# Altium PCB FiltrosRF_R00.PcbDoc
Units mil, origin at the board's own origin, x right, y up, seen from the top; angles counter-clockwise.
Board outline 2362.2 x 2755.91 mil, 2 copper layers (Top Layer, Bottom Layer); 32 components, 39 nets, 136 pads, 767 vias.
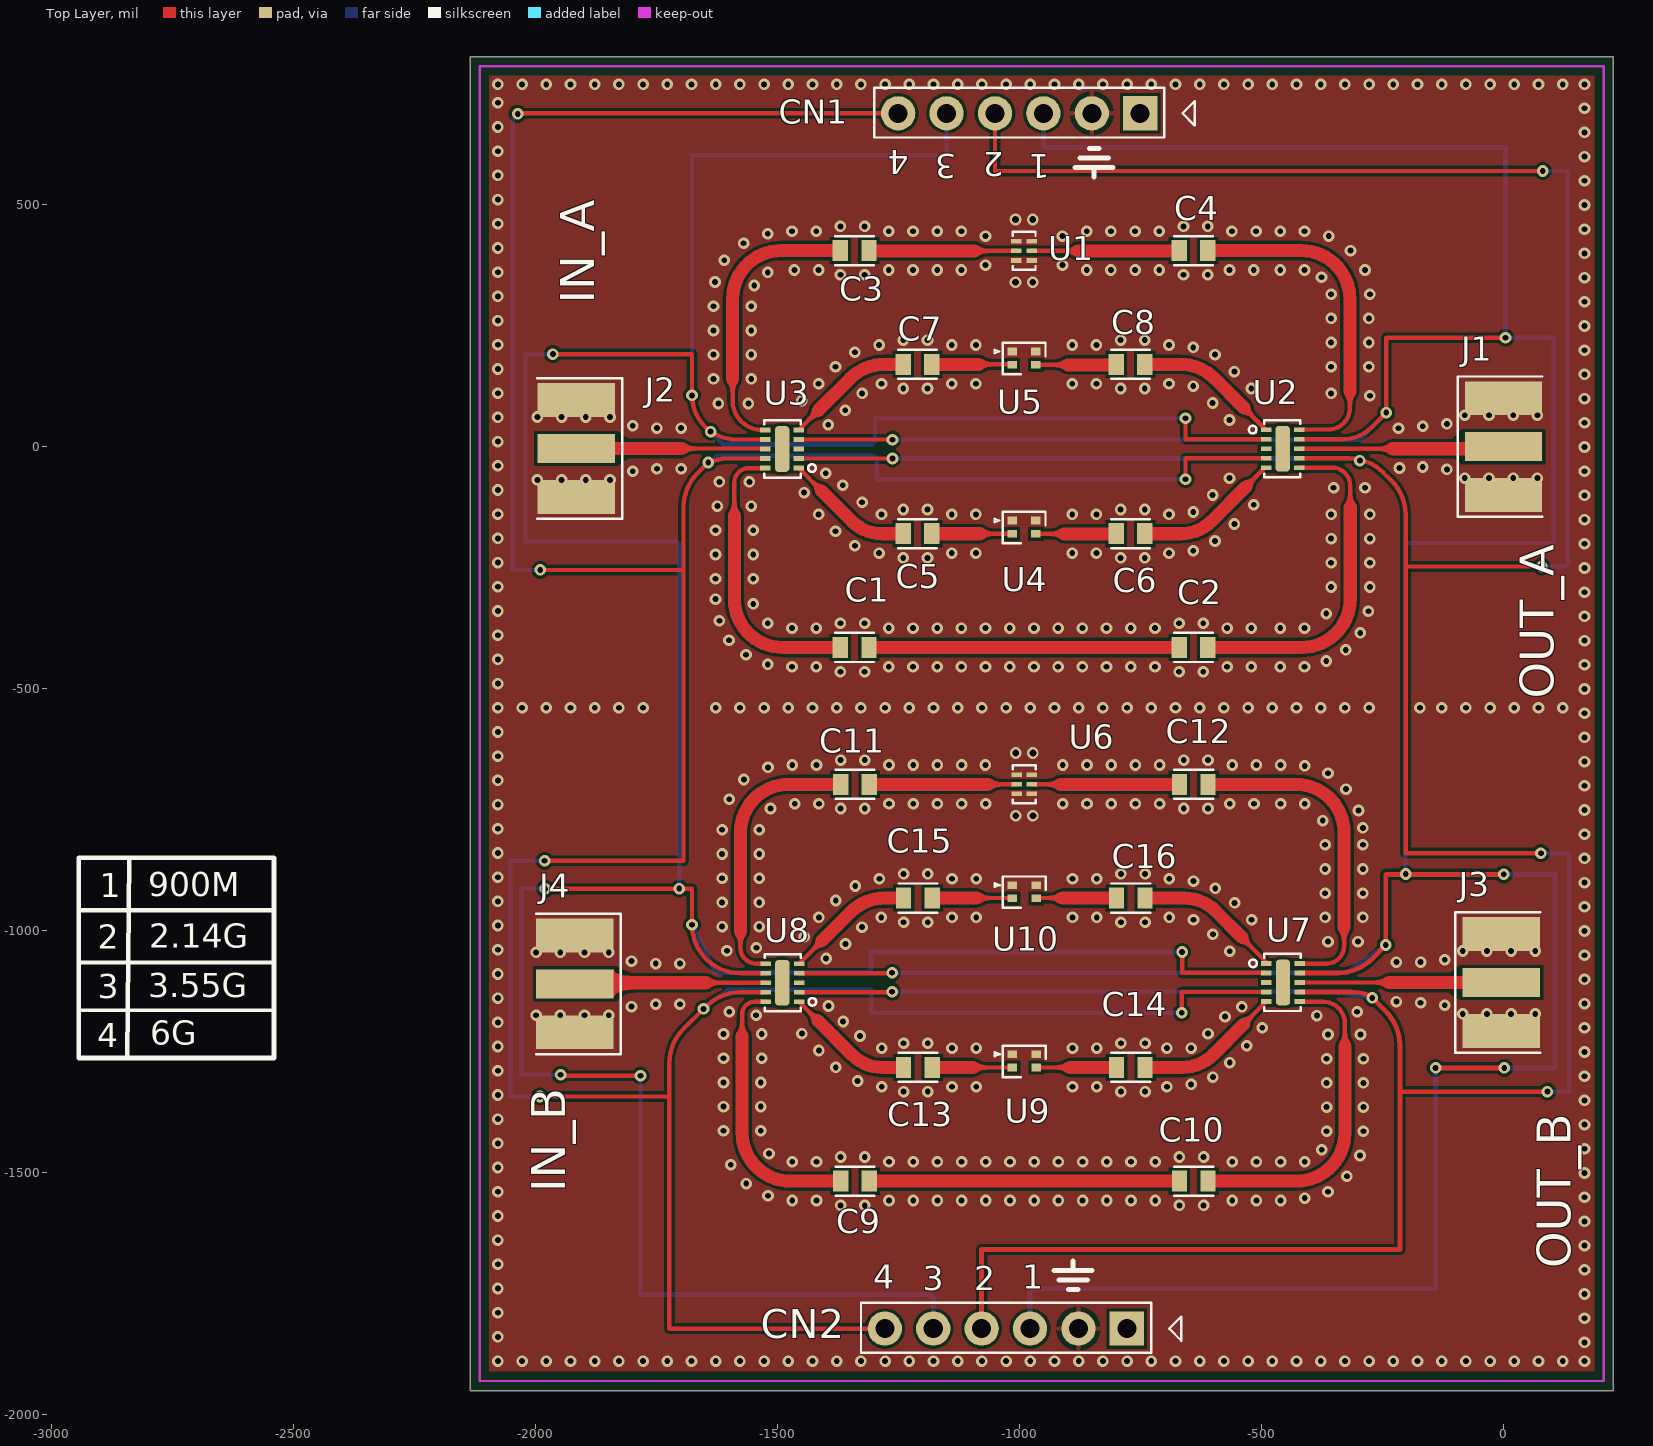
[diagram p0: Top Layer view]
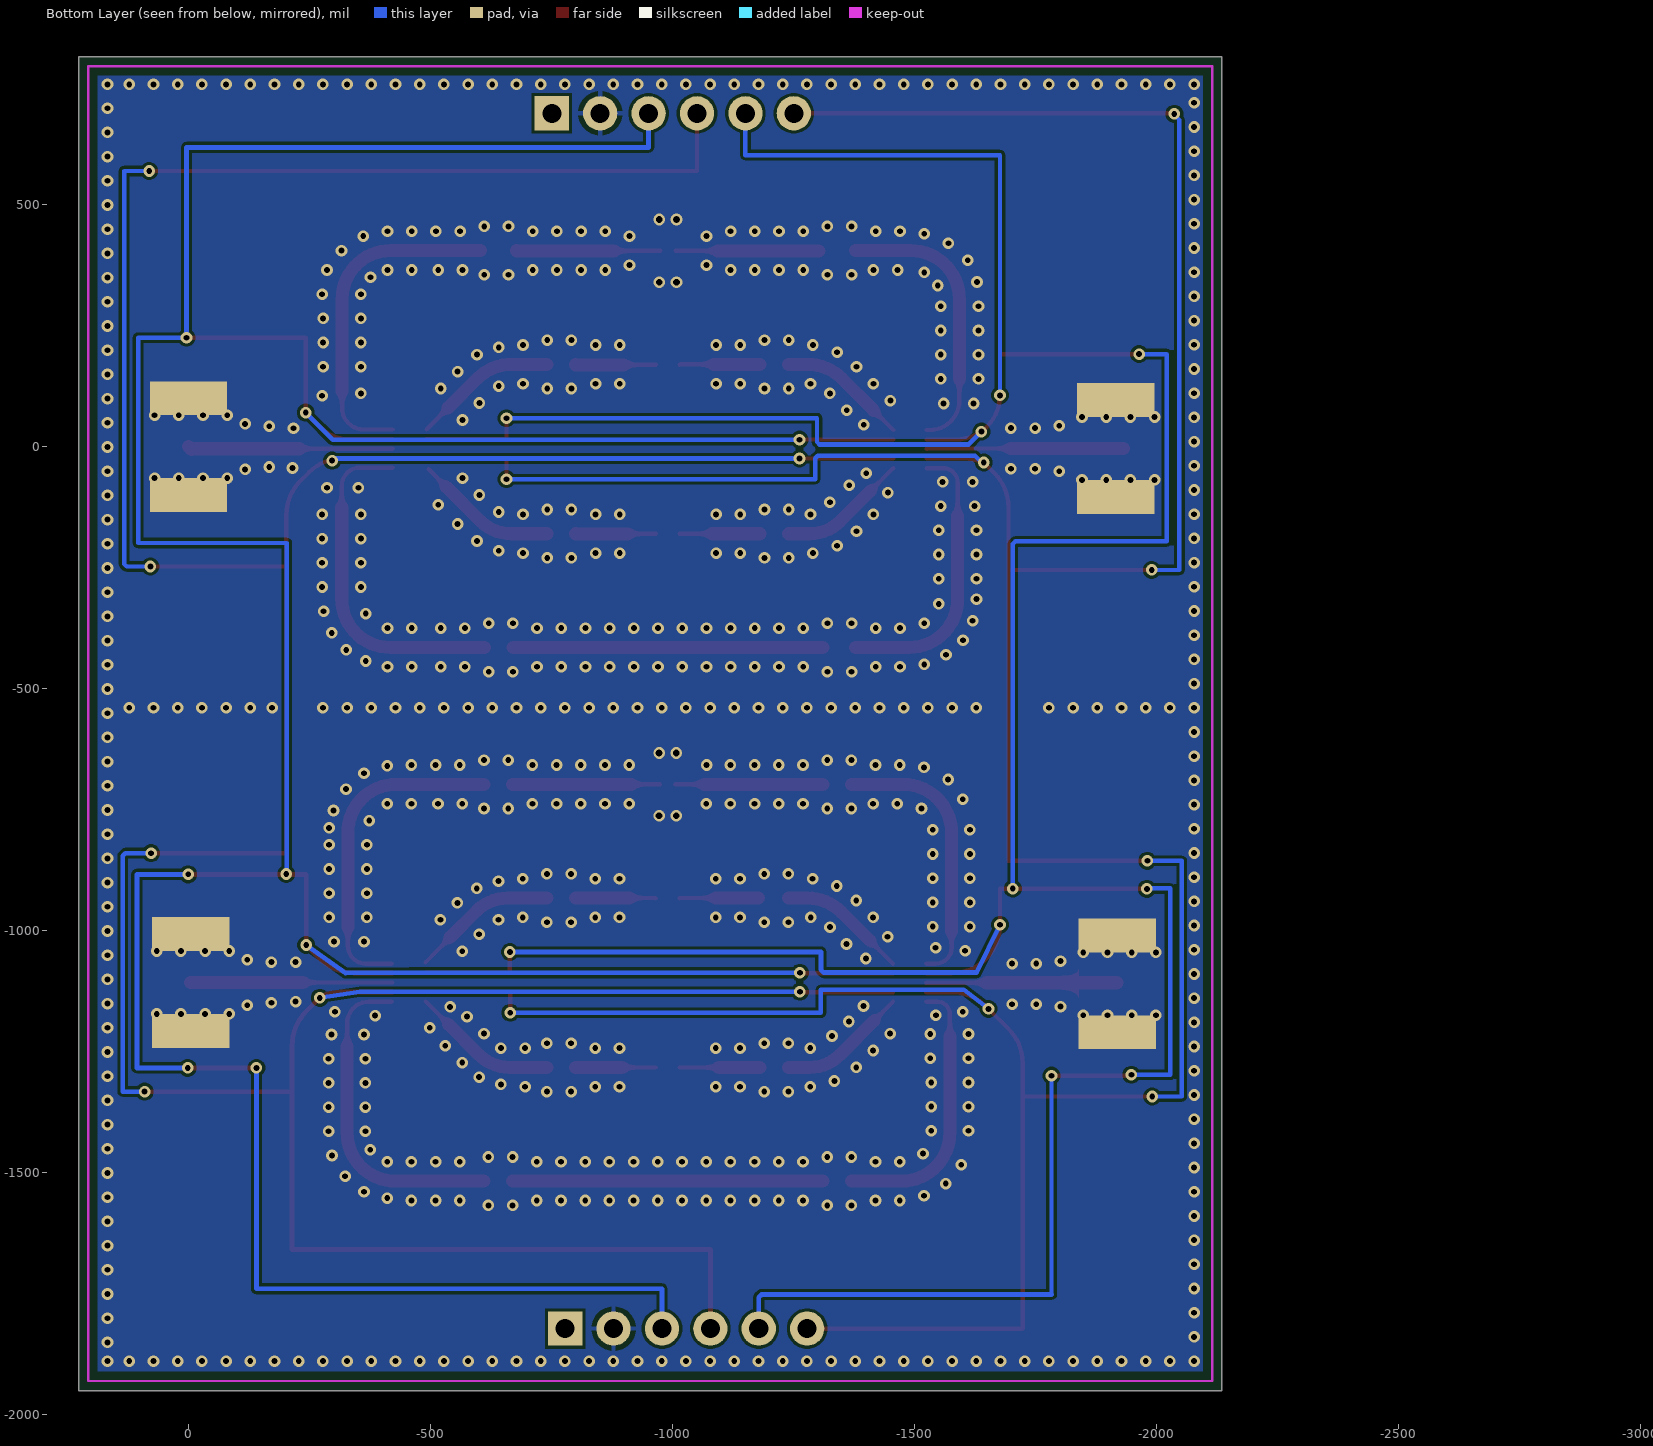
[diagram p1: Bottom Layer view, seen from below]
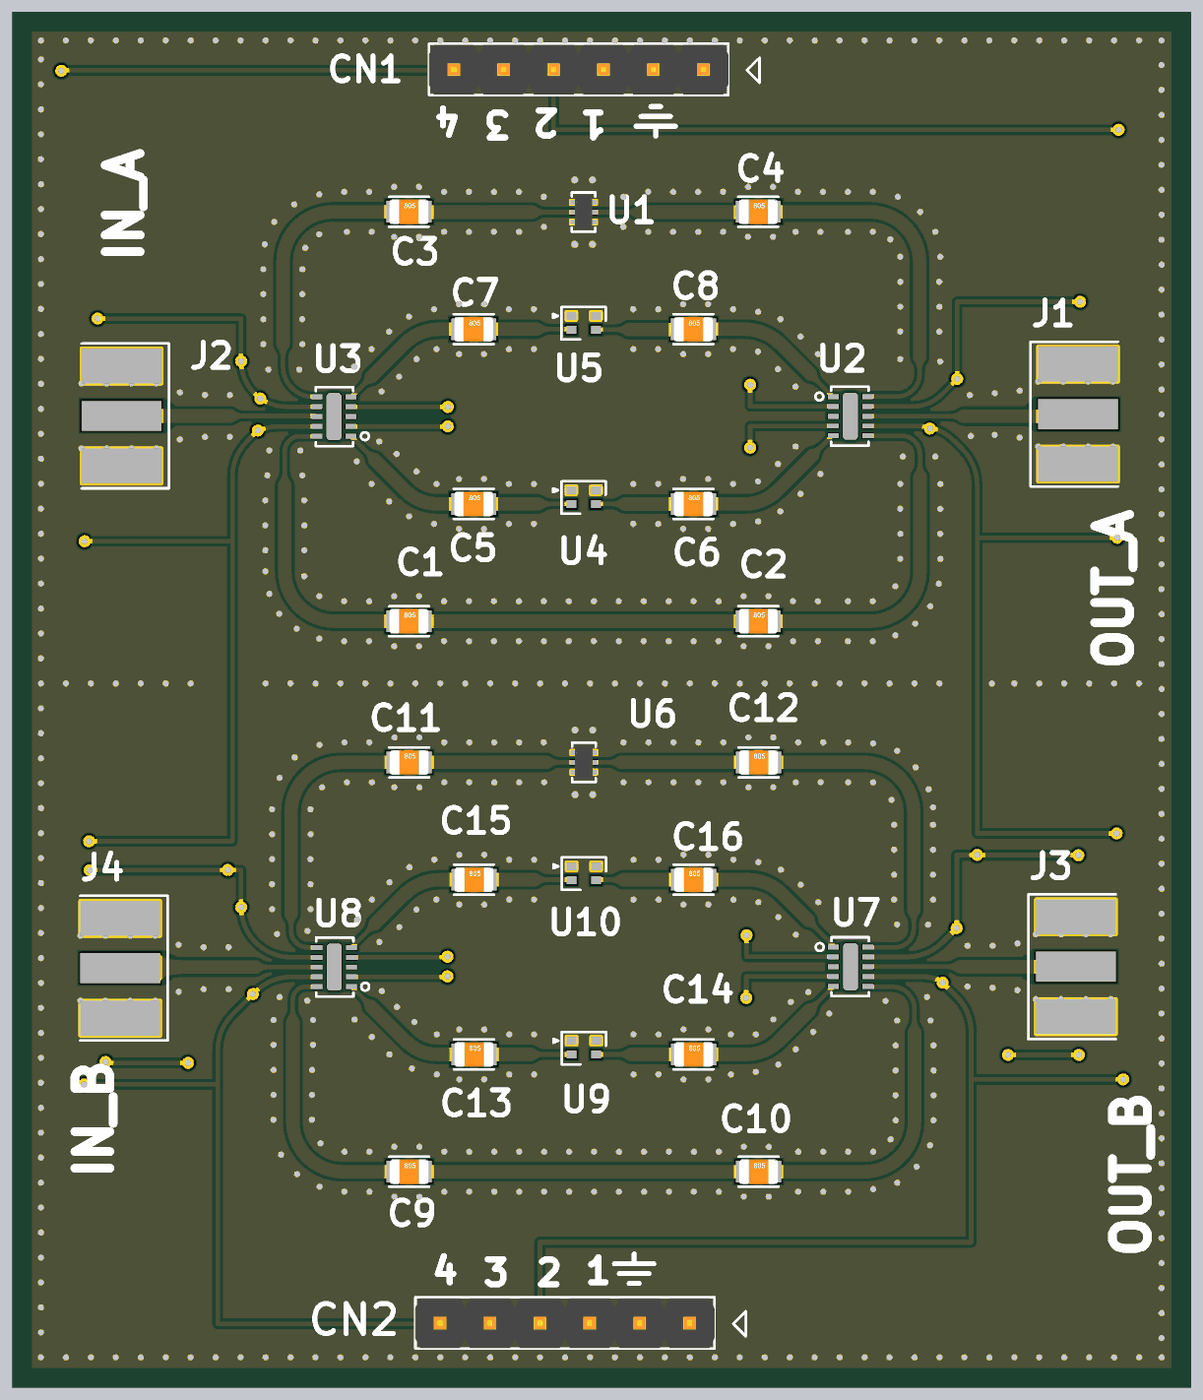
[diagram p2: 3D render of the assembled board from above, using the file's embedded part models]

## Layer stack, top to bottom
Top Solder: solder mask 0.4, Solder Resist, Dk 3.5
Top Layer: signal copper 1.4
Dielectric 1: dielectric 12.6, FR-4, Dk 4.8
Bottom Layer: signal copper 1.4
Bottom Solder: solder mask 0.4, Solder Resist, Dk 3.5

## Board outline
-2135.38,-1950.16 -2135.38,805.74 226.82,805.74 226.82,-1950.16

## Design rules (kind name [scope] priority, off if disabled: settings)
Clearance Clearance_1 [OnMid vs OnMid] p1: gap=6 ignorepadtopadclearanceinfootprint=FALSE sourcerule=39 cellrowname=All cellrowtype=0 cellcolname=All cellcoltype=0 innerlayers=TRUE
Clearance Clearance_2 [(ExistsOnLayer('Top Layer') Or ExistsOnLayer('Bottom Layer')) vs (ExistsOnLayer('Top Layer') Or ExistsOnLayer('Bottom Layer'))] p2: gap=6 ignorepadtopadclearanceinfootprint=FALSE sourcerule=39 cellrowname=All cellrowtype=0 cellcolname=All cellcoltype=0 outerlayers=TRUE
Clearance [All] p3: gap=10 ignorepadtopadclearanceinfootprint=FALSE ismatrix=TRUE
PolygonConnect [All] p1: thpad.connectstyle=Relief thpad.reliefconductorwidth=10 thpad.reliefentries=4 thpad.polygonreliefangle="90 Angle" thpad.airgapwidth=10 smdpad.connectstyle=Direct smdpad.reliefconductorwidth=10 smdpad.reliefentries=4 smdpad.polygonreliefangle="90 Angle" smdpad.airgapwidth=10 via.connectstyle=Direct via.reliefconductorwidth=10 via.reliefentries=4 via.polygonreliefangle="90 Angle" via.airgapwidth=10
RoutingVias RoutingViaStyle_1 [All] p1: holewidth=12 width=24 viastyle="Through Hole" minholewidth=12 minwidth=24 maxholewidth=24 maxwidth=50
RoutingVias [All] p2: holewidth=28 width=50 viastyle="Through Hole" minholewidth=28 minwidth=50 maxholewidth=28 maxwidth=50
SolderMaskExpansion [All] p1: expansion=4 istentingtop=FALSE
SupplyNets "Schematic Supply Nets" [InNet('GND')] p1: voltage=0.000
Width MaxMinWidth_1 [All] p1: maxlimit=100 minlimit=6 preferedwidth=8 minimp=50.000000 maximp=50.000000 favimp=50.000000
Width [All] p2: maxlimit=10 minlimit=10 preferedwidth=10
30 further rules are at their usual default settings.

## Components (designator, comment, footprint, x,y, rotation, side; value= is the part's Value field where it differs from the comment)
C1 "Capacitor" C_0603 -1340.7,-414.89 r0 top value=47pF
C2 "Capacitor" C_0603 -640.7,-414.89 r0 top value=47pF
C3 "Capacitor" C_0603 -1340.7,405.11 r0 top value=47pF
C4 "Capacitor" C_0603 -640.7,405.11 r0 top value=47pF
C5 "Capacitor" C_0603 -1210.7,-179.89 r0 top value=47pF
C6 "Capacitor" C_0603 -770.7,-179.89 r0 top value=47pF
C7 "Capacitor" C_0603 -1210.7,170.11 r0 top value=47pF
C8 "Capacitor" C_0603 -770.7,170.11 r0 top value=47pF
C9 "Capacitor" C_0603 -1340.11,-1517.64 r0 top value=47pF
C10 "Capacitor" C_0603 -640.11,-1517.64 r0 top value=47pF
C11 "Capacitor" C_0603 -1340.11,-697.64 r0 top value=47pF
C12 "Capacitor" C_0603 -640.11,-697.64 r0 top value=47pF
C13 "Capacitor" C_0603 -1210.11,-1282.64 r0 top value=47pF
C14 "Capacitor" C_0603 -770.11,-1282.64 r0 top value=47pF
C15 "Capacitor" C_0603 -1210.11,-932.64 r0 top value=47pF
C16 "Capacitor" C_0603 -770.11,-932.64 r0 top value=47pF
CN1 "CONN_06P" "Header_M_1x6_0.1\"" -750.74,688.81 r180 top
CN2 "CONN_06P" "Header_M_1x6_0.1\"" -778.3,-1822.21 r180 top
J1 "SMA_Connector" SMA_Connector 0,0 r270 top
J2 "SMA_Connector" SMA_Connector -1916.23,-3.71 r90 top
J3 "SMA_Connector" SMA_Connector -4.42,-1107.07 r270 top
J4 "SMA_Connector" SMA_Connector -1918.85,-1110.01 r90 top
U1 "3550LP14A0300001T" "Low Pass Filter 0603 6 Pins" -990.7,404.56 r0 top
U2 "SKY13322-375LF" "SP4T Switch RF" -490.7,35.11 r0 top
U3 "SKY13322-375LF" "SP4T Switch RF" -1456.25,-44.26 r180 top
U4 "LP0603A-XXXX-ANTR" "Low Pass Filter 0603 4 Pins" -990.7,-166.3 r0 top
U5 "LP0603A-XXXX-ANTR" "Low Pass Filter 0603 4 Pins" -990.7,182.91 r0 top
U6 "3550LP14A0300001T" "Low Pass Filter 0603 6 Pins" -990.11,-697.64 r0 top
U7 "SKY13322-375LF" "SP4T Switch RF" -490.11,-1067.64 r0 top
U8 "SKY13322-375LF" "SP4T Switch RF" -1455.66,-1147.01 r180 top
U9 "LP0603A-XXXX-ANTR" "Low Pass Filter 0603 4 Pins" -990.11,-1269.06 r0 top
U10 "LP0603A-XXXX-ANTR" "Low Pass Filter 0603 4 Pins" -990.11,-919.64 r0 top

## Footprints (in the part's own frame and the unit in brackets; to place one, negate y for a bottom-side part, rotate by r counter-clockwise, add the part's x,y. Pads: shape width x height; smd on the part's side, far side on the other; paste and mask are expansions set on the pad)
C_0603 [mm] "Chip Capacitor, 2-Leads,"
  rect 0.8x1.1 smd: 1(-0.75,0) 2(0.75,0)
  silkscreen extent -1.02,-0.76 1.02,0.76, body extent -1,-0.62 1,0.63, height 0.78
"Header_M_1x6_0.1\"" [mm] "Header Male 1 x 6 Vias Pitch 100mils"
  rect 1.8x1.8 hole 1: 1(0,0)
  round 1.8 hole 1: 2(2.54,0) 3(5.08,0) 4(7.62,0) 5(10.16,0) 6(12.7,0)
  silkscreen extent -2.86,-1.35 13.95,1.27, body extent -1.27,-1.3 13.97,1.24, height 8.47
"Low Pass Filter 0603 4 Pins" [mm]
  rect 0.5x0.4 smd: 1(-0.625,0.35) 2(-0.625,-0.35) 3(0.625,-0.35) 4(0.625,0.35)
  silkscreen extent -1.55,-0.85 1.12,0.8
"Low Pass Filter 0603 6 Pins" [mm]
  rect 0.55x0.25 smd mask+0.06: 1(-0.4,0.5) 2(-0.4,0) 3(-0.4,-0.5) 4(0.4,-0.5) 5(0.4,0) 6(0.4,0.5)
  silkscreen extent -0.6,-1 0.6,1, body extent -0.45,-0.85 0.45,0.85, height 0.71
SMA_Connector [mil] "SMA PCB Connector 1.6mm / PN: EMPCB.CSMAFSTJ.A"
  rect 60x160 smd: 1(0,0)
  rect 70x160 smd: 2(-100,0) 2(100,0)
  rect 70x160 smd far side: 2(-100,0) 2(100,0)
  silkscreen extent -145,-95 145,80, body extent -121,-60 121,80, height 10
"SP4T Switch RF" [mm]
  rect 0.55x0.25 smd mask+0.05: 1(0,0) 2(0,-0.5) 3(0,-1) 4(0,-1.5) 5(0,-2) 6(1.75,-2) 7(1.75,-1.5) 8(1.75,-1) 9(1.75,-0.5) 10(1.75,0)
  rrect50% 0.76x2.4 smd mask+0.05: ""(0.875,-1)
  silkscreen extent -0.9,-2.5 1.8,0.5

## Part data
CN1 CN2: "Connector Generic 4 Vias"
J1 J2 J3 J4: "Connector SMA"
U1 U6: "RF FILTER LOW PASS  0603"
U2 U3 U7 U8: "RF Switch IC General Purpose SP4T 6 GHz 50Ohm 10-MLPD (3x2)"
U4 U5 U9 U10: "RF FILTER 0603"
C1 C2 C3 C4 C5 C6 C7 C8 C9 C10 C11 C12 C13 C14 C15 C16: SimulationGenericComponent=True

## Via types
v1: diameter 24, hole 12, Top Layer to Bottom Layer, tented top, 724 vias
v2: diameter 24, hole 12, Top Layer to Bottom Layer, 35 vias
v3: diameter 24, hole 13.78, Top Layer to Bottom Layer, tented top, 4 vias
v4: diameter 24.02, hole 13.78, Top Layer to Bottom Layer, tented top, 4 vias

## Nets (pads, with @x,y where several pads share a name; then routed paths per layer and width w, separated by ;. In a path a pad name is that pad's centre, name@x,y a point inside that pad or via, vN(x,y) a via of type N, cw(c..) or ccw(c..) an arc to the next point about the centre after c; other vN are vias at no path point)
1A_IN: C7.1 U3.5 | length 267.9
  Top Layer w9: U3.5 -1415.7,75.03
  Top Layer w27: -1415.7,75.03 -1349.91,140.82 cw(c-1279.2,70.11) -1279.2,170.11 C7.1
1A_OUT: C6.2 U2.5 | length 296.2
  Top Layer w9: -532.51,-83.13 U2.5@-496.25,-46.87
  Top Layer w27: C6.2 -666.37,-179.89 ccw(c-666.37,-90.32) -603.04,-153.65 -532.51,-83.13
1B_IN: C15.1 U8.5 | length 267.9
  Top Layer w9: U8.5 -1407.85,-1020.46
  Top Layer w27: -1407.85,-1020.46 -1349.32,-961.93 cw(c-1278.61,-1032.64) -1278.61,-932.64 C15.1
1B_OUT: C14.2 U7.5 | length 303
  Top Layer w9: -537.61,-1193.88 U7.5
  Top Layer w27: C14.2 -663.59,-1282.64 ccw(c-663.59,-1192.78) -600.05,-1256.32 -537.61,-1193.88
2A_IN: C5.1 U3.1 | length 268.4
  Top Layer w9: U3.1 -1409.01,-91.5
  Top Layer w27: -1409.01,-91.5 -1346.17,-154.34 ccw(c-1284.49,-92.66) -1284.49,-179.89 C5.1
2A_OUT: C8.2 U2.1 | length 300.3
  Top Layer w9: -536.66,80.44 U2.1@-492.17,35.95
  Top Layer w27: C8.2 -667.75,170.11 cw(c-667.75,70.11) -597.04,140.82 -536.66,80.44
2B_IN: C13.1 U8.1 | length 268.4
  Top Layer w9: U8.1 -1416.09,-1186.58
  Top Layer w27: -1416.09,-1186.58 -1345.58,-1257.09 ccw(c-1283.9,-1195.41) -1283.9,-1282.64 C13.1
2B_OUT: C16.2 U7.1 | length 302.2
  Top Layer w9: -540.9,-1013.55 U7.1@-489.71,-1065.52
  Top Layer w27: C16.2 -659.6,-932.64 cw(c-659.6,-1023.91) -595.07,-959.37 -540.9,-1013.55
3A_IN: C3.1 U3.6 | length 584.2
  Top Layer w9: -1592.86,139.99 -1592.86,95.11 ccw(c-1532.23,95.11) -1532.23,34.48 U3.6
  Top Layer w27: -1592.86,139.99 -1592.86,305.11 cw(c-1492.86,305.11) -1492.86,405.11 C3.1@-1378.1,405.11
3A_OUT: C2.2 U2.6 | length 712.6
  Top Layer w9: U2.6@-422.19,-43.31 -354.08,-43.31 cw(c-354.08,-80.71) -316.68,-80.71 -316.68,-125.2
  Top Layer w27: C2.2 -416.68,-414.89 ccw(c-416.68,-314.89) -316.68,-314.89 -316.68,-125.2
3B_IN: C11.1 U8.6 | length 572.8
  Top Layer w9: -1576.72,-1001.34 -1576.72,-1035.2 ccw(c-1543.65,-1035.2) -1543.65,-1068.27 U8.6
  Top Layer w27: -1576.72,-1001.34 -1576.72,-797.64 cw(c-1476.72,-797.64) -1476.72,-697.64 C11.1
3B_OUT: C10.2 U7.6 | length 684
  Top Layer w9: U7.6@-420.28,-1147.01 -372.24,-1147.01 cw(c-372.24,-1191.5) -327.76,-1191.5 -327.76,-1237.96
  Top Layer w27: C10.2 -427.76,-1517.64 ccw(c-427.76,-1417.64) -327.76,-1417.64 -327.76,-1237.96
4A_IN: C1.1 U3.10 | length 590.1
  Top Layer w9: -1589.32,-141.9 -1589.32,-74.57 cw(c-1559.01,-74.57) -1559.01,-44.26 U3.10
  Top Layer w27: -1589.32,-141.9 -1589.32,-314.89 ccw(c-1489.32,-314.89) -1489.32,-414.89 C1.1@-1378.1,-414.89
4A_OUT: C4.2 U2.10 | length 698.3
  Top Layer w9: U2.10@-422.19,35.43 -365.11,35.43 -361.96,35.39 ccw(c-361.96,79.88) -317.47,79.88 -317.47,114.13
  Top Layer w27: C4.2@-603.3,405.11 -417.47,405.11 cw(c-417.47,305.11) -317.47,305.11 -317.47,114.13
4B_IN: C9.1 U8.10 | length 568.9
  Top Layer w9: -1573.18,-1217.88 -1573.18,-1172.6 cw(c-1547.59,-1172.6) -1547.59,-1147.01 U8.10
  Top Layer w27: -1573.18,-1217.88 -1573.18,-1417.64 ccw(c-1473.18,-1417.64) -1473.18,-1517.64 C9.1
4B_OUT: C12.2 U7.10 | length 684
  Top Layer w9: U7.10@-420.28,-1068.27 -366.34,-1068.27 ccw(c-366.34,-1031.27) -329.33,-1031.27 -329.33,-993.86
  Top Layer w27: C12.2 -429.33,-697.64 cw(c-429.33,-797.64) -329.33,-797.64 -329.33,-993.86
CTRL1: CN1.3 CN2.3 U2.9 U3.4 U7.9 U8.4 | length 8719.5
  Top Layer w9: U3.4 v2@-1262.55,14.8 ; U8.4 -1264.36,-1087.96 v2(-1263.34,-1086.93) ; U2.9 -331.52,15.43 ccw(c-331.52,98.53) -272.76,39.77 v2(-242.23,70.29) -242.23,225 v2(4,225)
  Top Layer w10: U7.9 -342.28,-1087.33 ccw(c-342.28,-987.33) -271.57,-1058.04 v2(-243.23,-1029.71) -243.23,-883.64 v2(0.58,-883.64) ; v2(-140.42,-1283.64) v2(1.58,-1283.64)
  Bottom Layer w9: v2(-202,-883) -203,-883 -203,-199 104,-199 104,225 v2(4,225)
  Bottom Layer w10: v2(-1263.34,-1086.93) -456.25,-1086.93 -324.22,-1087.38 v2(-243.23,-1029.71) ; v2(-1262.55,14.4) -298.12,14.4 v2(-242.23,70.29) ; CN2.3 -978.3,-1739.93 -140.42,-1739.93 v2(-140.42,-1283.64) ; CN1.3 -950.74,618.34 4,618.34 v2(4,225) ; v2(0.58,-883.64) 106.58,-883.64 106.58,-1283.64 v2(1.58,-1283.64)
CTRL2: CN1.4 CN2.4 U2.7 U3.2 U7.7 U8.2 | length 8680
  Top Layer w9: U3.2 v2(-1262.55,-24.57) ; U8.2 -1264.36,-1127.33 v2(-1263.34,-1126.3) ; CN1.4 -1050.74,569.52 v2(81.15,569.52) ; U2.7 -319.56,-23.94 cw(c-319.56,-123.94) -248.85,-53.23 -231.6,-70.48 cw(c-302.31,-141.19) -202.31,-141.19 -202.31,-245.71 ; -214.12,-1332.64 v2(90.58,-1332.64) ; v2(77.21,-839.93) -202.31,-839.93 -202.31,-247.71 v2(78.77,-247.71)
  Top Layer w10: CN2.4 -1078.3,-1658.82 -214.12,-1658.82 -214.12,-1332.64 -214.12,-1237.55 ccw(c-314.12,-1237.55) -243.41,-1166.84 v2(-271.37,-1138.89) ; U7.7 -315.23,-1126.7 cw(c-315.23,-1226.7) v2@-269.83,-1137.6
  Bottom Layer w9: v2(-1263.34,-1126.3) -354.23,-1126.3 v2(-271.37,-1138.89) ; v2(77.21,-839.93) 130.49,-839.93 135.77,-845.2 135.77,-1332.64 v2(90.58,-1332.64) ; v2(78.77,-247.71) 127.73,-247.71 133,-242.43 133,569.52 v2(81.15,569.52)
  Bottom Layer w10: v2(-1262.55,-24.57) -296.8,-24.57 v2(-296.8,-28.9)
CTRL3: CN1.5 CN2.5 U2.2 U3.7 U7.2 U8.7 | length 8137.8
  Top Layer w9: v2(-1980.23,-913.71) -1676.72,-913.71 v2(-1676.72,-987.96) ccw(c-1576.72,-987.96) -1576.72,-1087.96 U8.7 ; v2(-1964.23,191.29) -1676.72,191.29 v2(-1676.72,105.98) ccw(c-1585.54,105.98) -1585.54,14.8 U3.7 ; v2(-1948.23,-1297.71) -1948.23,-1299.71 v2(-1783.23,-1299.71) ; v2(-664.1,-1044.07) -664.1,-1087.33 U7.2 ; v2(-657.04,58.73) -657.04,15.43 U2.2
  Bottom Layer w9: v2(-1980.23,-913.71) -1980.23,-912.71 -2028.23,-912.71 -2028.23,-1297.71 v2(-1948.23,-1297.71) ; v2(-1964.23,191.29) -2021.23,191.29 -2021.23,-195.71 -1708.51,-195.71 -1703.23,-200.98 v2(-1703.23,-913.15) ; -1783.23,-1751.74 v2(-1783.23,-1299.71) ; v2(-1676.72,105.98) -1676.72,602.36 -1150.74,602.36 CN1.5 ; -1304.04,4.29 -1298.77,9.57 -1298.77,58.73 v2(-657.04,58.73)
  Bottom Layer w10: -1783.23,-1751.74 -1184.15,-1751.74 -1178.3,-1757.6 CN2.5 ; v2(-1676.72,-987.96) -1628.28,-1086.71 -1312.5,-1086.71 -1309.57,-1083.78 -1306.64,-1080.85 -1306.64,-1044.07 v2(-664.1,-1044.07) ; v2(-1638.41,31.18) -1611.52,4.29 -1304.04,4.29
CTRL4: CN1.6 CN2.6 U2.4 U3.9 U7.4 U8.9 | length 8003.3
  Top Layer w9: v2@-2038.53,688.81 CN1.6 ; v2(-1991.23,-1342.71) -1723.57,-1342.71 ; v2(-1990.23,-254.71) -1696.65,-254.71 ccw(c-1696.65,-251.29) -1694.23,-253.71 ; v2(-1981.23,-855.71) -1694.23,-855.71 -1694.23,-253.71 ; v2(-1653.1,-1161.74) -1694.28,-1202.92 ccw(c-1623.57,-1273.63) -1723.57,-1273.63 -1723.57,-1342.71 ; v2@-1652.19,-1161.72 cw(c-1576.72,-1227.33) -1576.72,-1127.33 U8.9 ; v2@-1643.7,-33.94 cw(c-1601.44,-124.57) -1601.44,-24.57 U3.9 ; v2(-1643.26,-32.84) -1664.94,-54.53 ccw(c-1594.23,-125.24) -1694.23,-125.24 -1694.23,-253.71 ; CN2.6 -1723.57,-1822.21 -1723.57,-1342.71 ; v2(-664.91,-1169.61) -664.91,-1126.7 U7.4 ; v2(-657.04,-67.25) -657.04,-23.94 U2.4
  Bottom Layer w9: v2(-2036.96,687.63) -2036.96,685.32 -2047.42,674.86 -2047.42,-254.71 v2(-1990.23,-254.71) ; v2(-1991.23,-1342.71) -2052.23,-1342.71 -2052.23,-855.71 v2(-1981.23,-855.71) ; v2(-1653.1,-1161.74) -1602.23,-1122.37 -1306.64,-1122.37 -1306.64,-1169.61 v2(-664.91,-1169.61) ; v2(-1643.26,-32.84) -1639.2,-32.84 -1625.06,-18.71 -1300.1,-18.71 -1294.83,-23.98 -1294.83,-67.25 -1286.96,-67.25 v2(-657.04,-67.25)
GND: CN1.2 CN2.2 J1.2 J2.2 J3.2 J4.2 U1.1 U1.3 U1.4 U1.6 U4.1 U4.4 U5.1 U5.4 U6.1 U6.3 U6.4 U6.6 U9.1 U9.4 U10.1 U10.4
  other v1: -2077.74,-1889.48 -2027.74,-1889.48 -1977.74,-1889.48 -1927.74,-1889.48 -1877.74,-1889.48 -1827.74,-1889.48 -1777.74,-1889.48 -1727.74,-1889.48 -1677.74,-1889.48 -1627.74,-1889.48 -1577.74,-1889.48 -1527.74,-1889.48 -1477.74,-1889.48 -1427.74,-1889.48 -1377.74,-1889.48 -1327.74,-1889.48 -1277.74,-1889.48 -1227.74,-1889.48 -1177.74,-1889.48 -1127.74,-1889.48 -1077.74,-1889.48 -1027.74,-1889.48 -977.74,-1889.48 -927.74,-1889.48 -877.74,-1889.48 -827.74,-1889.48 -777.74,-1889.48 -727.74,-1889.48 -677.74,-1889.48 -627.74,-1889.48 -577.74,-1889.48 -527.74,-1889.48 -477.74,-1889.48 -427.74,-1889.48 -377.74,-1889.48 -327.74,-1889.48 -277.74,-1889.48 -227.74,-1889.48 -177.74,-1889.48 -127.74,-1889.48 -77.74,-1889.48 -27.74,-1889.48 22.26,-1889.48 72.26,-1889.48 122.26,-1889.48 167.26,-1889.48 167.26,-1850.72 -2077.74,-1839.48 167.26,-1800.72 -2077.74,-1789.48 167.26,-1750.72 -2077.74,-1739.48 167.26,-1700.72 -2077.74,-1689.48 167.26,-1650.72 -2077.74,-1639.48 167.26,-1600.72 -2077.74,-1589.48 -1369.64,-1567.64 -1319.64,-1567.64 -669.64,-1567.64 -619.64,-1567.64 -1469.64,-1557.64 -1419.64,-1557.64 -1269.64,-1557.64 -1219.64,-1557.64 -1169.64,-1557.64 -1119.64,-1557.64 -1069.64,-1557.64 -1019.64,-1557.64 -969.64,-1557.64 -919.64,-1557.64 -869.64,-1557.64 -819.64,-1557.64 -769.64,-1557.64 -719.64,-1557.64 -560.58,-1557.64 -510.58,-1557.64 -460.58,-1557.64 -410.58,-1552.64 167.26,-1550.72 -1519.64,-1547.64 -2077.74,-1539.48 -362.58,-1539.64 -1564.64,-1522.64 -323.58,-1507.64 167.26,-1500.72 -2077.74,-1489.48 -1596.64,-1483.64 -1469.64,-1477.64 -1419.64,-1477.64 -1269.64,-1477.64 -1219.64,-1477.64 -1169.64,-1477.64 -1119.64,-1477.64 -1069.64,-1477.64 -1019.64,-1477.64 -969.64,-1477.64 -919.64,-1477.64 -869.64,-1477.64 -819.64,-1477.64 -769.64,-1477.64 -719.64,-1477.64 -560.58,-1477.64 -510.58,-1477.64 -460.58,-1477.64 -410.58,-1477.64 -1369.64,-1467.64 -1319.64,-1467.64 -669.64,-1467.64 -619.64,-1467.64 -296.58,-1464.64 -1517.64,-1460.64 -375.58,-1452.64 167.26,-1450.72 -2077.74,-1439.48 -365.58,-1414.64 -289.58,-1414.64 -1611.64,-1413.64 -1534.64,-1413.64 167.26,-1400.72 -2077.74,-1389.48 -365.58,-1364.64 -289.58,-1364.64 -1611.64,-1363.64 -1534.64,-1363.64 167.26,-1350.72 -2077.74,-1339.48 -1239.64,-1332.64 -1189.64,-1332.64 -790.58,-1332.64 -740.58,-1332.64 -1284.64,-1322.64 -1139.64,-1322.64 -1089.64,-1322.64 -890.58,-1322.64 -840.58,-1322.64 -695.58,-1322.64 -645.58,-1317.64 -365.58,-1314.64 -289.58,-1314.64 -1611.64,-1313.64 -1534.64,-1313.64 -1334.64,-1310.64 -600.58,-1302.64 167.26,-1300.72 -2077.74,-1289.48 -1379.64,-1282.64 -565.58,-1272.64 -365.58,-1264.64 -289.58,-1264.64 -1611.64,-1263.64 -1532.64,-1263.64 167.26,-1250.72 -1414.64,-1247.64 -1284.64,-1242.64 -1139.64,-1242.64 -1089.64,-1242.64 -890.58,-1242.64 -840.58,-1242.64 -695.58,-1242.64 -645.58,-1242.64 -2077.74,-1239.48 -530.58,-1237.64 -1239.64,-1232.64 -1189.64,-1232.64 -790.58,-1232.64 -740.58,-1232.64 -1329.64,-1217.64 -362.58,-1214.64 -295.58,-1214.64 -1611.64,-1213.64 -1532.64,-1213.64 -1449.64,-1212.64 -610.58,-1212.64 167.26,-1200.72 -498.58,-1200.64 -2077.74,-1189.48 -1364.64,-1187.64 -575.58,-1177.64 -1998.85,-1175.01 -1948.85,-1175.01 -1898.85,-1175.01 -1848.85,-1175.01 -1544.26,-1174.91 -385.58,-1175.64 -84.42,-1172.07 -34.42,-1172.07 15.58,-1172.07 65.58,-1172.07 -1599.64,-1167.64 -302.58,-1167.64 -1801.85,-1157.01 -540.58,-1157.64 -1394.64,-1155.64 -121.42,-1154.07 -1751.85,-1152.01 -1701.85,-1152.01 167.26,-1150.72 -171.42,-1149.07 -221.42,-1146.64 -2077.74,-1139.48 167.26,-1100.72 -2077.74,-1089.48 -1751.85,-1068.01 -1701.85,-1068.01 -221.42,-1065.07 -171.42,-1065.07 -1801.85,-1063.01 -121.42,-1060.07 -1399.64,-1057.64 167.26,-1050.72 -1998.85,-1045.01 -1948.85,-1045.01 -1898.85,-1045.01 -1848.85,-1045.01 -565.58,-1042.64 -84.42,-1042.07 -34.42,-1042.07 15.58,-1042.07 65.58,-1042.07 -1604.64,-1041.64 -2077.74,-1039.48 -1543.65,-1035.2 -1359.64,-1027.64 -362.58,-1022.64 -300.58,-1022.64 -1444.64,-1012.64 -600.58,-1007.64 167.26,-1000.72 -1325.58,-992.64 -1614.64,-991.64 -1537.64,-991.64 -2077.74,-989.48 -1239.64,-982.64 -1189.64,-982.64 -790.58,-982.64 -740.58,-982.64 -640.58,-977.64 -520.58,-977.64 -1414.64,-972.64 -1285.58,-972.64 -1139.64,-972.64 -1089.64,-972.64 -890.58,-972.64 -840.58,-972.64 -690.58,-972.64 -368.58,-972.64 -290.58,-972.64 167.26,-950.72 -555.58,-942.64 -1614.64,-941.64 -1537.64,-941.64 -2077.74,-939.48 -1379.64,-937.64 -368.58,-922.64 -290.58,-922.64 -595.58,-912.64 -1339.64,-907.64 167.26,-900.72 -640.58,-897.64 -1289.64,-892.64 -1139.64,-892.64 -1089.64,-892.64 -890.58,-892.64 -840.58,-892.64 -690.58,-892.64 -1614.64,-891.64 -1537.64,-891.64 -2077.74,-889.48 -1239.64,-882.64 -1189.64,-882.64 -790.58,-882.64 -740.58,-882.64 -368.58,-872.64 -290.58,-872.64 167.26,-850.72 -1614.64,-841.64 -1537.64,-841.64 -2077.74,-839.48 -368.58,-822.64 -290.58,-822.64 167.26,-800.72 -1614.64,-791.64 -1537.64,-791.64 -2077.74,-789.48 -290.58,-787.64 -373.58,-772.64 -299.58,-751.64 167.26,-750.72 -1514.64,-747.64 -1369.64,-747.64 -1319.64,-747.64 -660.58,-747.64 -610.58,-747.64 -2077.74,-739.48 -1464.64,-737.64 -1414.64,-737.64 -1269.64,-737.64 -1219.64,-737.64 -1169.64,-737.64 -1119.64,-737.64 -1069.64,-737.64 -910.58,-737.64 -860.58,-737.64 -810.58,-737.64 -760.58,-737.64 -710.58,-737.64 -565.58,-737.64 -515.58,-737.64 -460.58,-737.64 -410.58,-737.64 -1599.64,-728.64 -325.58,-707.64 167.26,-700.72 -2077.74,-689.48 -1569.64,-687.64 -362.58,-674.64 -1519.64,-662.64 -410.58,-659.64 -1469.64,-657.64 -1419.64,-657.64 -1269.64,-657.64 -1219.64,-657.64 -1169.64,-657.64 -1119.64,-657.64 -1070.58,-657.64 -910.58,-657.64 -860.58,-657.64 -810.58,-657.64 -760.58,-657.64 -710.58,-657.64 -560.58,-657.64 -510.58,-657.64 -460.58,-657.64 167.26,-650.72 -1369.64,-647.64 -1319.64,-647.64 -660.58,-647.64 -610.58,-647.64 -2077.74,-639.48 167.26,-600.72 -2077.74,-589.48 167.26,-550.72 -2077.74,-539.48 -2027.74,-539.48 -1977.74,-539.48 -1927.74,-539.48 -1877.74,-539.48 -1827.74,-539.48 -1777.74,-539.48 -1627.74,-539.48 -1577.74,-539.48 -1527.74,-539.48 -1477.74,-539.48 -1427.74,-539.48 -1377.74,-539.48 -1327.74,-539.48 -1277.74,-539.48 -1227.74,-539.48 -1177.74,-539.48 -1127.74,-539.48 -1077.74,-539.48 -1027.74,-539.48 -977.74,-539.48 -927.74,-539.48 -877.74,-539.48 -827.74,-539.48 -777.74,-539.48 -727.74,-539.48 -677.74,-539.48 -627.74,-539.48 -577.74,-539.48 -527.74,-539.48 -477.74,-539.48 -427.74,-539.48 -377.74,-539.48 -327.74,-539.48 -277.74,-539.48 -172.74,-539.48 -127.74,-539.48 -77.74,-539.48 -27.74,-539.48 22.26,-539.48 72.26,-539.48 122.26,-539.48 167.26,-500.72 -2077.74,-489.48 -1370.23,-464.89 -1320.23,-464.89 -670.23,-464.89 -620.23,-464.89 -1470.23,-454.89 -1420.23,-454.89 -1270.23,-454.89 -1220.23,-454.89 -1170.23,-454.89 -1120.23,-454.89 -1070.23,-454.89 -1020.23,-454.89 -970.23,-454.89 -920.23,-454.89 -870.23,-454.89 -820.23,-454.89 -770.23,-454.89 -720.23,-454.89 -571.17,-454.89 -521.17,-454.89 -461.17,-454.89 -411.17,-454.89 167.26,-450.72 -1520.23,-449.89 -366.17,-442.89 -2077.74,-439.48 -1565.23,-429.89 -326.17,-419.89 167.26,-400.72 -1600.23,-399.89 -2077.74,-389.48 -296.17,-384.89 -1470.23,-374.89 -1420.23,-374.89 -1270.23,-374.89 -1220.23,-374.89 -1170.23,-374.89 -1120.23,-374.89 -1070.23,-374.89 -1020.23,-374.89 -970.23,-374.89 -920.23,-374.89 -870.23,-374.89 -820.23,-374.89 -770.23,-374.89 -720.23,-374.89 -571.17,-374.89 -521.17,-374.89 -461.17,-374.89 -411.17,-374.89 -1520.23,-364.89 -1370.23,-364.89 -1320.23,-364.89 -670.23,-364.89 -620.23,-364.89 -1620.23,-359.89 167.26,-350.72 -366.17,-344.89 -279.17,-339.89 -2077.74,-339.48 -1550.23,-324.89 -1628.23,-314.89 167.26,-300.72 -356.17,-289.89 -276.17,-289.89 -2077.74,-289.48 -1628.23,-272.89 -1550.23,-272.89 167.26,-250.72 -356.17,-239.89 -276.17,-239.89 -2077.74,-239.48 -1240.23,-229.89 -1190.23,-229.89 -791.17,-229.89 -741.17,-229.89 -1628.23,-222.89 -1550.23,-222.89 -1290.23,-219.89 -1140.23,-219.89 -1090.23,-219.89 -891.17,-219.89 -841.17,-219.89 -691.17,-219.89 -641.17,-214.89 -1340.23,-204.89 167.26,-200.72 -596.17,-194.89 -356.17,-189.89 -276.17,-189.89 -2077.74,-189.48 -1380.23,-174.89 -1628.32,-172.89 -1550.23,-172.89 -556.17,-159.89 167.26,-150.72 -1415.23,-139.89 -1285.23,-139.89 -1140.23,-139.89 -1090.23,-139.89 -891.17,-139.89 -841.17,-139.89 -691.17,-139.89 -356.17,-139.89 -276.17,-139.89 -2077.74,-139.48 -641.17,-134.89 -1240.23,-129.89 -1190.23,-129.89 -791.17,-129.89 -741.17,-129.89 -1624.23,-122.89 -1554.23,-122.89 -516.17,-119.89 -1325.23,-114.89 167.26,-100.72 -601.17,-99.89 -1445.23,-94.89 -2077.74,-89.48 -351.17,-84.89 -286.17,-84.89 -1365.23,-79.89 -1620.23,-72.89 -1558.23,-72.89 -1996.23,-68.71 -1946.23,-68.71 -1896.23,-68.71 -1846.23,-68.71 -566.17,-64.89 -80,-65 -30,-65 20,-65 70,-65 -1400.23,-54.89 -1799.23,-50.71 167.26,-50.72 -117,-47 -1749.23,-45.71 -1699.23,-45.71 -215,-44 -167,-42 -2077.74,-39.48 167.26,-0.72 -2077.74,10.52 -1749.23,38.29 -1699.23,38.29 -217,38 -167,42 -1799.23,43.29 -1395.23,45.11 -117,47 167.26,49.28 -566.17,55.11 -2077.74,60.52 -1996.23,61.29 -1946.23,61.29 -1896.23,61.29 -1846.23,61.29 -80,65 -30,65 20,65 70,65 -1360.23,75.11 -1622.23,89.11 -1560.23,89.11 -601.17,90.11 -1450.23,95.11 167.26,99.28 -276.17,105.11 -1325.23,110.11 -356.17,110.11 -2077.74,110.52 -1240.23,120.11 -1190.23,120.11 -791.17,120.11 -741.17,120.11 -521.17,120.11 -641.17,125.11 -1415.23,130.11 -1285.23,130.11 -1140.23,130.11 -1090.23,130.11 -891.17,130.11 -841.17,130.11 -691.17,130.11 -1632.23,140.11 -1554.23,140.11 167.26,149.28 -556.17,155.11 -2077.74,160.52 -1380.23,165.11 -356.17,165.11 -278.17,165.11 -1632.23,190.11 -1554.23,190.11 -596.17,190.11 -1340.23,195.11 167.26,199.28 -641.17,205.11 -1290.23,210.11 -1140.23,210.11 -1090.23,210.11 -891.17,210.11 -841.17,210.11 -691.17,210.11 -2077.74,210.52 -356.17,215.11 -278.17,215.11 -1240.23,220.11 -1190.23,220.11 -791.17,220.11 -741.17,220.11 -1632.23,240.11 -1554.23,240.11 167.26,249.28 -2077.74,260.52 -356.17,265.11 -278.17,265.11 -1632.23,290.11 -1554.23,290.11 167.26,299.28 -2077.74,310.52 -356.17,315.11 -276.17,315.11 -1548.23,333.11 -1629.23,340.11 167.26,349.28 -376.17,350.11 -1370.23,355.11 -1320.23,355.11 -661.17,355.11 -611.17,355.11 -1520.23,360.11 -2077.74,360.52 -1465.23,365.11 -1415.23,365.11 -1270.23,365.11 -1220.23,365.11 -1170.23,365.11 -1120.23,365.11 -861.17,365.11 -811.17,365.11 -761.17,365.11 -711.17,365.11 -566.17,365.11 -516.17,365.11 -461.17,365.11 -411.17,365.11 -286.17,365.11 -1070.23,375.11 -911.17,375.11 -1610.23,385.11 167.26,399.28 -316.17,405.11 -2077.74,410.52 -1570.23,420.11 -1070.23,435.11 -911.17,435.11 -361.17,435.11 -1520.23,440.11 -1470.23,445.11 -1420.23,445.11 -1270.23,445.11 -1220.23,445.11 -1170.23,445.11 -1120.23,445.11 -861.17,445.11 -811.17,445.11 -761.17,445.11 -711.17,445.11 -561.17,445.11 -511.17,445.11 -461.17,445.11 -411.17,445.11 167.26,449.28 -1370.23,455.11 -1320.23,455.11 -661.17,455.11 -611.17,455.11 -2077.74,460.52 167.26,499.28 -2077.74,510.52 167.26,549.28 -2077.74,560.52 167.26,599.28 -2077.74,610.52 167.26,649.28 -2077.74,660.52 167.26,699.28 -2077.74,710.52 -2077.74,748.52 -2027.74,748.52 -1977.74,748.52 -1927.74,748.52 -1877.74,748.52 -1827.74,748.52 -1777.74,748.52 -1727.74,748.52 -1677.74,748.52 -1627.74,748.52 -1577.74,748.52 -1527.74,748.52 -1477.74,748.52 -1427.74,748.52 -1377.74,748.52 -1327.74,748.52 -1277.74,748.52 -1227.74,748.52 -1177.74,748.52 -1127.74,748.52 -1077.74,748.52 -1027.74,748.52 -977.74,748.52 -927.74,748.52 -877.74,748.52 -827.74,748.52 -777.74,748.52 -727.74,748.52 -677.74,748.52 -627.74,748.52 -577.74,748.52 -527.74,748.52 -477.74,748.52 -427.74,748.52 -377.74,748.52 -327.74,748.52 -277.74,748.52 -227.74,748.52 -177.74,748.52 -127.74,748.52 -77.74,748.52 -27.74,748.52 22.26,748.52 72.26,748.52 122.26,748.52 167.26,748.52
  other v3: -1007.86,-762.33 -972.36,-632.96 -972.95,339.88 -972.95,469.25
  other v4: -972.36,-762.33 -1007.86,-632.96 -1008.45,339.88 -1008.45,469.25
IN_A: J2.1 U3.8 | length 407.4
  Top Layer w9: -1698.38,-3.71 -1528,-3.71 cw(c-1528,-7.74) U3.8
  Top Layer w27: J2.1@-1932.23,-3.71 J2.1 -1698.38,-3.71
IN_B: J4.1 U8.8 | length 394.3
  Top Layer w9: -1647.59,-1107.64 U8.8
  Top Layer w27: J4.1@-1918.85,-1107.64 -1647.59,-1107.64
NetC1_2: C1.2 C2.1 | length 640.9
  Top Layer w27: C1.2 C2.1
NetC3_2: C3.2 U1.2 | length 296.3
  Top Layer w9: -1093.06,404.56 U1.2
  Top Layer w27: C3.2@-1302.75,404.56 -1093.06,404.56
NetC4_1: C4.1 U1.5 | length 297.4
  Top Layer w9: U1.5 -878.86,404.56
  Top Layer w27: -878.86,404.56 -678.1,404.56 C4.1@-678.1,405.11
NetC5_2: C5.2 U4.2 | length 166.1
  Top Layer w9: -1081.45,-179.89 -1015.3,-179.89 U4.2
  Top Layer w27: C5.2 -1081.45,-179.89
NetC6_1: C6.1 U4.3 | length 166.1
  Top Layer w9: U4.3 -908.02,-180.08
  Top Layer w27: -908.02,-180.08 -800.23,-180.08 C6.1
NetC7_2: C7.2 U5.2 | length 166.3
  Top Layer w9: -1084.4,170.11 -1016.29,170.11 U5.2
  Top Layer w27: C7.2 -1084.4,170.11
NetC8_1: C8.1 U5.3 | length 166.9
  Top Layer w9: U5.3 -900.15,169.13
  Top Layer w27: -900.15,169.13 -800.23,169.13 C8.1
NetC9_2: C9.2 C10.1 | length 640.9
  Top Layer w27: C9.2 C10.1
NetC11_2: C11.2 U6.2 | length 304.7
  Top Layer w9: -1064.91,-697.64 U6.2
  Top Layer w27: C11.2 -1064.91,-697.64
NetC12_1: C12.1 U6.5 | length 304.7
  Top Layer w9: U6.5 -915.3,-697.64
  Top Layer w27: -915.3,-697.64 C12.1
NetC13_2: C13.2 U9.2 | length 166.1
  Top Layer w9: -1096.41,-1282.64 -1014.71,-1282.64 U9.2
  Top Layer w27: C13.2 -1096.41,-1282.64
NetC14_1: C14.1 U9.3 | length 166.1
  Top Layer w9: U9.3 -965.5,-1282.64 -895.62,-1282.64
  Top Layer w27: -895.62,-1282.64 C14.1
NetC15_2: C15.2 U10.2 | length 163.4
  Top Layer w9: -1088.53,-932.64 -1014.71,-932.64 U10.2
  Top Layer w27: C15.2@-1177.35,-932.64 -1088.53,-932.64
NetC16_1: C16.1 U10.3 | length 166.2
  Top Layer w9: U10.3 -964.72,-932.64 -911.37,-932.64
  Top Layer w27: -911.37,-932.64 C16.1
OUT_A: J1.1 U2.8 | length 425
  Top Layer w9: U2.8 -229.48,-4.26
  Top Layer w27: -229.48,-4.26 -7.74,-4.26 -6,-6 J1.1
OUT_B: J3.1 U7.8 | length 416.8
  Top Layer w9: U7.8 -236.35,-1107.01
  Top Layer w27: -236.35,-1107.01 -4.48,-1107.01 J3.1
pads on no net: CN1.1 CN2.1 U2. U2.3 U3. U3.3 U7. U7.3 U8. U8.3

## Polygon pours and split planes (outlines as drawn)
GND on Bottom Layer "gnd" (solid, remove dead copper, pour order 7): -2096.01,-1910.79 -2096.01,766.37 187.45,766.37 187.45,-1910.79
GND on Top Layer "gnd" (solid, remove dead copper, pour order 4): -2096.01,-1910.79 -2096.01,766.37 187.45,766.37 187.45,-1910.79

## Keep-outs
Keep-Out Layer:
  lines w5: -2115.7,-1930.48 207.14,-1930.48 207.14,786.06 -2115.7,786.06 -2115.7,-1930.48

## Other copper
Top Layer:
  pour cut-out: -86,-36 -107.21,-21.06 -85.83,-12.2
  pour cut-out: -86,36 -109,14 -86,7
  pour cut-out: -90.42,-1143.07 -111.53,-1129.93 -90.25,-1122.03
  pour cut-out: -90.42,-1071.07 -111.61,-1087.08 -90.64,-1089.75
  pour cut-out: -1832.85,-1146.01 -1811.63,-1129.27 -1832.63,-1127.33
  pour cut-out: -1832.85,-1074.01 -1804.03,-1087.1 -1833.41,-1089.53
  pour cut-out: -1830.23,-39.71 -1809.12,-25.14 -1830.01,-19.06
  pour cut-out: -1830.23,32.29 -1809.04,17.71 -1830.41,14.01

## Silkscreen, mask and mechanical layers (free items; w line width, h text height)
Top Overlay:
  lines w8: -2943.97,-1164.49 -2540.42,-1164.49 ; -2943.97,-1066.07 -2540.42,-1066.07
  lines w10: -2943.97,-957.8 -2540.42,-957.8 ; -2843.57,-1260.95 -2839.64,-851.5 ; -928.69,-1702.13 -849.95,-1702.13 ; -918.85,-1721.82 -859.79,-1721.82 ; -899.16,-1741.5 -879.48,-1741.5 ; -889.32,-1702.13 -889.32,-1682.45 ; -885.38,576.61 -806.64,576.61 ; -875.54,596.29 -816.49,596.29 ; -855.86,615.98 -836.17,615.98 ; -846.01,556.92 -846.01,576.61 ; -2943.97,-1262.92 -2540.42,-1262.92 -2540.42,-849.53 -2943.97,-849.53 -2943.97,-1262.92
  text "4" at -1229.12,612.46 h50 r180
  text "2" at -1032.27,608.52 h50 r180
  text "3" at -1130.7,604.58 h50 r180
  text "1" at -937.79,604.58 h50 r180
  text "IN_A" at -1878.53,295.59 h70 r90
  text "OUT_A" at 103.81,-520.71 h70 r90
  text "900M" at -2800.14,-929.17 h50
  text "1" at -2900.5,-931.17 h50
  text "2.14G" at -2798.17,-1035.47 h50
  text "2" at -2904.44,-1037.47 h50
  text "3.55G" at -2800.14,-1137.83 h50
  text "3" at -2904.44,-1139.83 h50
  text "6G" at -2796.2,-1236.26 h50
  text "4" at -2906,-1240.98 h50
  text "IN_B" at -1939.11,-1540.4 h70 r90
  text "OUT_B" at 139.24,-1697.88 h70 r90
  text "4" at -1301.88,-1739.56 h50
  text "1" at -994.79,-1739.56 h50
  text "3" at -1199.52,-1743.49 h50
  text "2" at -1093.22,-1743.49 h50
Mechanical 1:
  the board outline again, w10

## Dimensions
226.82,805.74 to 226.82,-1950.16 on Mechanical 16
-2135.38,-1950.16 to 226.82,-1950.16 on Mechanical 16